# EAGLE board TCRT1001_sensor_sch (EAGLE 7.3.0)
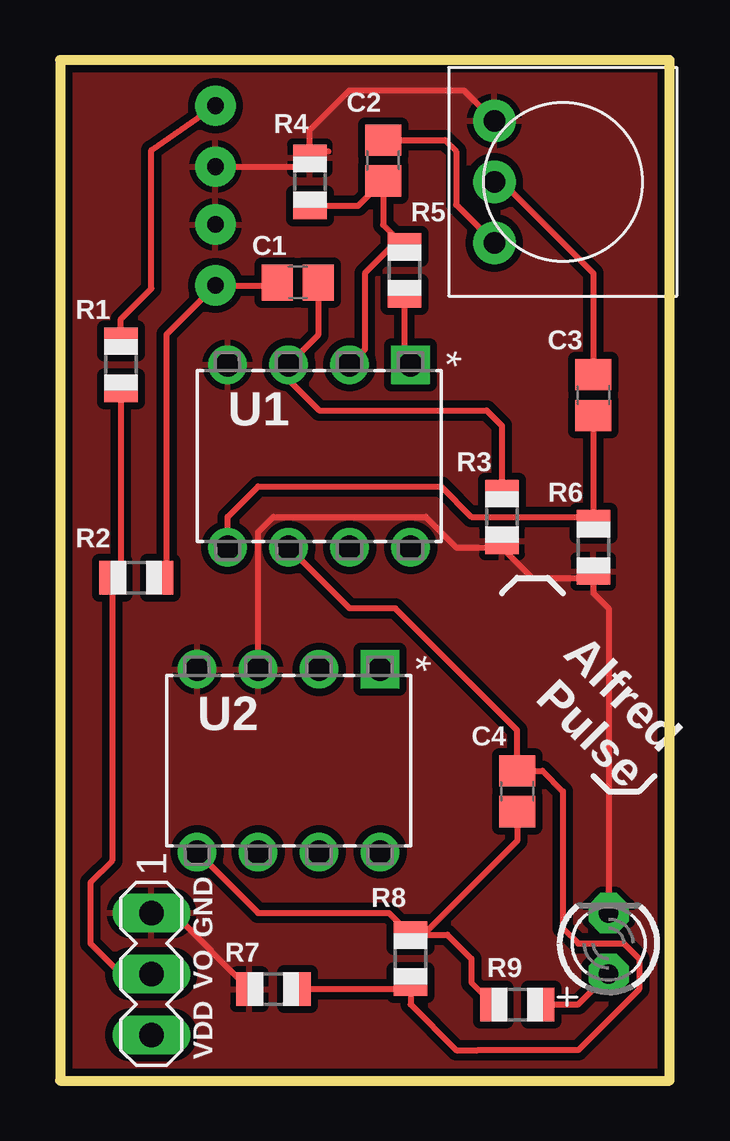
[diagram p0: board, top side]
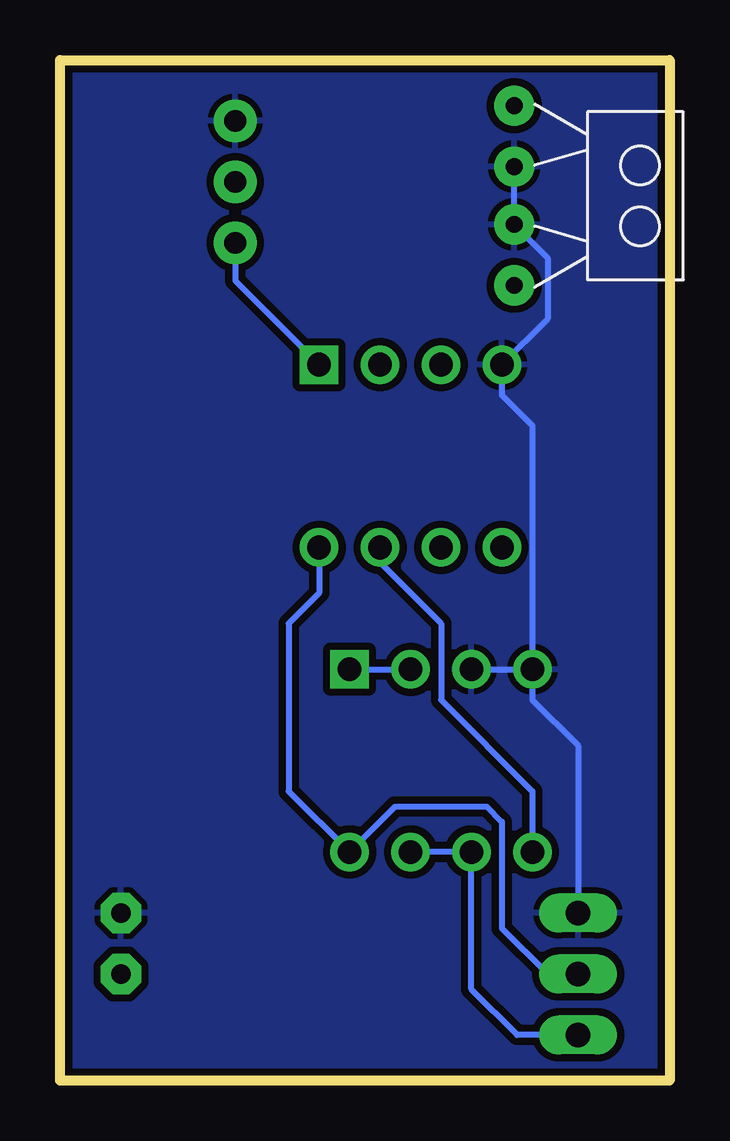
[diagram p1: board, bottom side, seen from below]

Size 25.4 x 42.55 mm. Coordinates in mm from the lower left corner, seen from the top.
Outline: 0,0 25.4,0 25.4,42.55 0,42.55 0,0
Copper layers (1*16): Top 0.035mm / dielectric 1.5mm / Bottom 0.035mm
Design rules "SparkFun": minimum track width 8mil, minimum drill 20mil, track to track 8mil, track to pad 8mil, pad to pad 8mil, via to via 8mil, smd to smd 8mil, copper to edge 8mil, drill to drill 8mil, minimum pad ring 12mil, minimum via ring 10mil, stop-mask expansion 4mil, vias tented up to drill 20mil, thermal gap 10mil

## Footprints (pad centres in the part's own frame; a part is rotated, then mirrored left to right if it is on the bottom)
C0805 = smd 1.3 x 1.5: 1 -0.85,0; 2 0.85,0
LED3MM = drill 0.813 pad 1.676 octagon: A -1.27,0; K 1.27,0
R0805 = smd 1.1 x 1.4: 1 -1,0; 2 1,0
MA03-1 = drill 1.016 long: 1 -2.54,0; 2 0,0; 3 2.54,0
TRIM-3386 = drill 0.9 pad 1.778: 1 -2.54,-2.857; 2 0,-2.857; 3 2.54,-2.857
DIP254P762X533-8 = drill 0.991 square: 1 -7.62,7.62 | drill 0.991: 2 -7.62,5.08; 3 -7.62,2.54; 4 -7.62,0; 5 0,0; 6 0,2.54; 7 0,5.08; 8 0,7.62
TCRT1001 = drill 0.7 pad 1.676: P$1 -0.254,-3.048; P$2 2.286,-3.048; P$3 4.699,-3.048; P$4 7.239,-3.048

## Placement (x,y rotation side)
C1  4.7u  [C0805]  9.91,33.27 0 top
C2  100n  [C0805]  13.46,38.35 90 top
C3  4.7u  [C0805]  22.23,28.57 270 top
C4  100n  [C0805]  19.05,12.06 270 top
LED1  [LED3MM]  22.86,5.71 90 top
R1  150  [R0805]  2.54,29.84 270 top
R2  10k  [R0805]  3.17,20.95 180 top
R3  47k  [R0805]  18.41,23.5 270 top
R4  6.8k  [R0805]  10.41,37.47 90 top
R5  680k  [R0805]  14.35,33.78 90 top
R6  47k  [R0805]  22.23,22.23 90 top
R7  6.8k  [R0805]  8.89,3.81 0 top
R8  680k  [R0805]  14.61,5.08 270 top
R9  1k  [R0805]  19.05,3.17 180 top
SV1  [MA03-1]  3.81,4.45 270 top
TM1  [TRIM-3386]  20.95,37.47 270 top
U1  MCP6002-I/P  [DIP254P762X533-8]  6.99,22.23 270 top
U2  MCP6002-I/P  [DIP254P762X533-8]  5.71,9.53 270 top
U$1  TCRT1001  [TCRT1001]  3.43,40.39 270 bottom

## Library data of the parts
C1-C4 LED1 R1-R9 TM1 = adafruit
SV1 = con-lstb; OC_FARNELL: unknown; OC_NEWARK: unknown
U1 U2 = Microchip_By_element14_Batch_1; MPN: MCP6002-I/P; OC_FARNELL: 1292245; OC_NEWARK: 96K3734; PACKAGE: PDIP8; SUPPLIER: Microchip
U$1 = tcrt1001

## Nets
BUFF: C4.2 R8.1 R9.2 U1.7 U2.5
GND: LED1.K R3.2 R4.2 R6.1 R7.1 SV1.1 TM1.1 U1.4 U2.3 U2.4 U$1.P$2 U$1.P$3
N$1: R1.1 U$1.P$1
N$2: C1.1 R2.1 U$1.P$4
N$3: C1.2 R3.1 U1.3
N$4: C2.1 R4.1 R5.2 U1.2
N$5: C2.2 R5.1 TM1.3 U1.1
N$6: C3.1 TM1.2
N$7: C3.2 R6.2 U1.5
N$8: LED1.A R9.1
N$9: C4.1 R7.2 R8.2 U1.6
N$13: U2.1 U2.2
VDD: R1.2 R2.2 SV1.2 U1.8 U2.8
VOUT: SV1.3 U2.6 U2.7

## Tracks (layer width: path | path; a pad name or v marks a point on that pad's centre or on a via)
BUFF
  Top 0.254: 15.14,6.08 R8.1 13.7,6.99 8.26,6.99 U2.5 | C4.2 19.05,9.98 15.14,6.08 | 15.14,6.08 16.14,6.08 17.14,5.08 17.14,4.08 R9.2
  Bottom 0.254: U2.5 5.71,12.06 9.53,15.88 9.53,19.05 12.06,21.59 U1.7
GND
  Top 0.254: TM1.1 16.83,41.27 12.06,41.27 10.41,39.62 R4.2 | LED1.K 22.86,19.68 22.23,20.32 R6.1 21.95,20.95 19.68,20.95 18.41,22.23 R3.2 18.14,22.23 16.51,22.23 15.24,23.5 8.89,23.5 8.26,22.86 U2.3 | 11.19,38.73 R4.2 | SV1.1 4.71,6.99 R7.1 | U$1.P$2 10.05,38.1 R4.2
  Bottom 0.254: U2.3 U2.4 | U$1.P$2 U$1.P$3 5.08,34.29 5.08,31.75 U1.4 6.99,28.57 5.71,27.3 U2.4 | U2.4 5.71,15.88 3.81,13.97 SV1.1
  pour Top (isolate 0.305): 0,0 25.4,0 25.4,42.55 0,42.55
  pour Bottom (isolate 0.305): 0,0 25.4,0 25.4,42.55 0,42.55
N$1
  Top 0.254: R1.1 2.54,31.75 3.81,33.02 3.81,38.78 U$1.P$1
N$2
  Top 0.254: 8.55,33.78 C1.1 8.93,33.15 U$1.P$4 4.45,31.11 4.45,21.23 R2.1
N$3
  Top 0.254: R3.1 18.41,27.3 17.78,27.94 10.79,27.94 9.53,29.21 U1.3 10.76,31.08 C1.2
N$4
  Top 0.254: R4.1 12.42,36.47 C2.1 13.46,35.67 R5.2 13.83,34.78 12.7,33.66 12.7,30.48 U1.2
N$5
  Top 0.254: TM1.3 16.51,36.51 16.51,38.73 16.04,39.2 C2.2 | R5.1 14.35,30.1 U1.1
  Bottom 0.254: TM1.3 18.1,33.34 U1.1
N$6
  Top 0.254: TM1.2 18.41,37.47 22.23,33.66 C3.1
N$7
  Top 0.254: C3.2 R6.2 21.95,23.5 17.14,23.5 15.88,24.77 8.26,24.77 6.99,23.5 U1.5
N$8
  Top 0.254: R9.1 21.59,3.17 LED1.A
N$9
  Top 0.254: R7.2 14.34,3.81 R8.2 14.61,3.17 16.51,1.27 17.41,1.27 17.78,1.27 21.59,1.27 24.13,3.81 24.13,5.08 23.5,5.71 21.59,5.71 20.95,6.35 20.95,12.06 20.11,12.91 C4.1 19.05,14.61 13.97,19.68 12.06,19.68 U1.6
N$13
  Bottom 0.254: U2.1 U2.2
VDD
  Top 0.254: SV1.2 2.54,4.45 1.27,5.71 1.27,8.26 2.17,9.16 R2.2 2.54,21.32 R1.2
  Bottom 0.254: SV1.2 5.08,4.45 6.99,6.35 6.99,10.79 7.62,11.43 11.43,11.43 U2.8 15.88,12.06 15.88,19.05 14.61,20.32 U1.8
VOUT
  Bottom 0.254: U2.7 U2.6 8.26,3.81 6.35,1.91 SV1.3

## Text on the board
tPlace: C2 | R4 | R5 | C1 | R1 | C3 | U1 | R3 | R6 | R2 | U2 | Alfred / Pulse | C4 | R8 | GND | R7 | VO | R9 | VDD